# Altium PCB Agilent_ocxo.PcbDoc
Units mil, origin at the board's own origin, x right, y up, seen from the top; angles counter-clockwise.
Board outline 3631.03 x 2132.49 mil, 2 copper layers (Top Layer, Bottom Layer), stack 65.792 mil thick; 47 components, 28 nets, 162 pads, 673 vias.
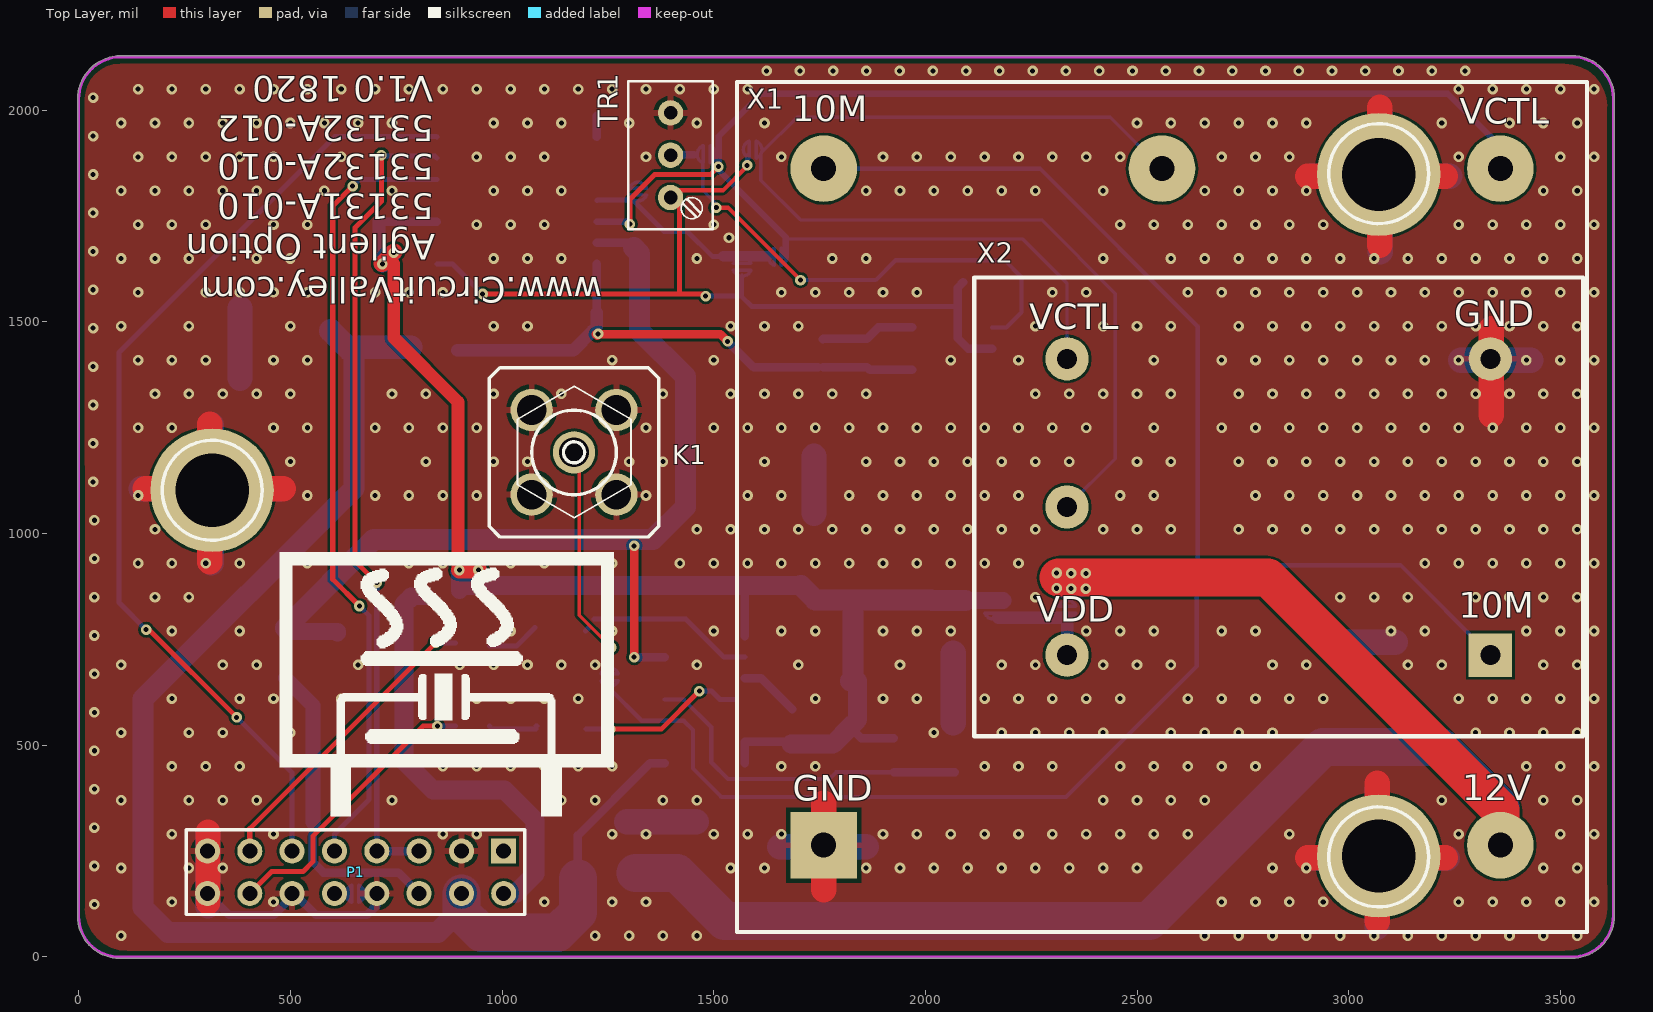
[diagram p0: Top Layer view]
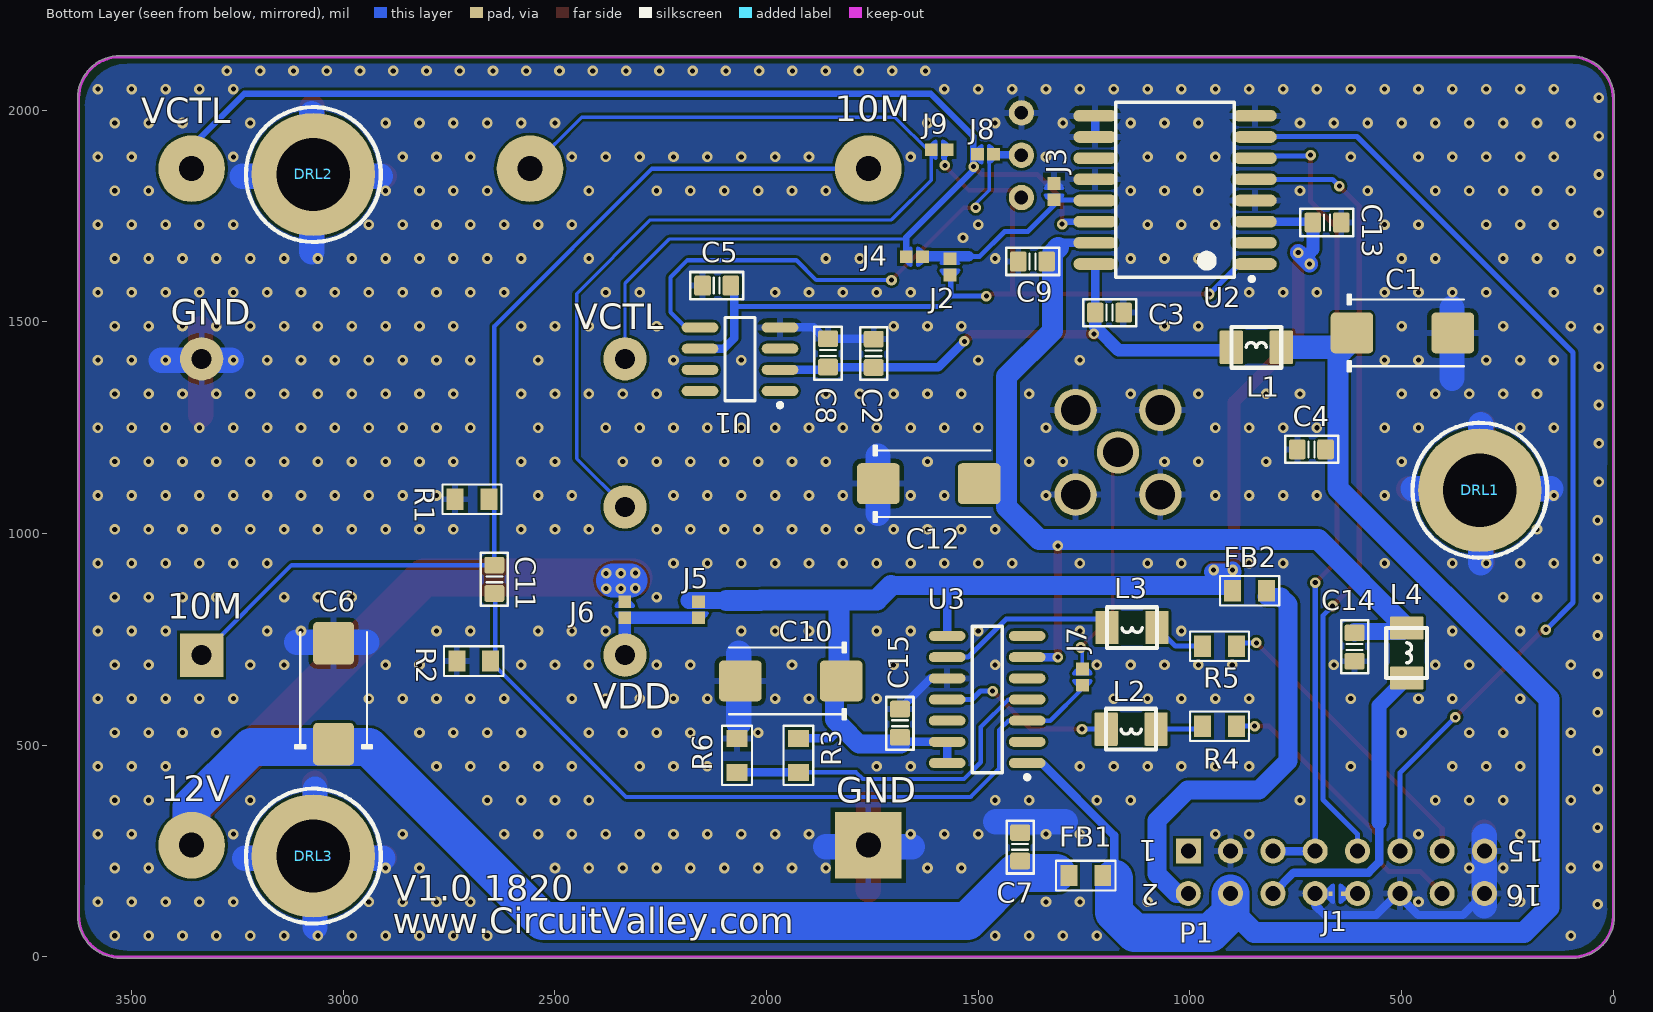
[diagram p1: Bottom Layer view, seen from below]

## Layer stack, top to bottom
Top Solder: solder mask 0.4, Solder Resist, Dk 3.5
Top Layer: signal copper 1.4
Dielectric 1: dielectric 62.9921, FR-4, Dk 4.8
Bottom Layer: signal copper 1.4
Bottom Solder: solder mask 0.4, Solder Resist, Dk 3.5

## Board outline
-3.01,95.95 -3.01,2026.03 cw(c0,2026.03) -3.01,2026.12 cw(c99.95,2026.03) 98.3,2128.98 cw(c99.95,2126.47) 101.57,2129.01 241,2129.01 cw(c241,2126) 241.07,2129.01 453.37,2129 1681.97,2129.01 1691,2129.01 1811,2129.01 cw(c1811,2126) 1811.07,2129.01 3247.33,2129.01 3443,2129.02 3527.75,2129.02 cw(c3527.75,2126) 3527.81,2129.01 cw(c3527.75,2028.75) 3628.01,2028.75 3628.01,1851 cw(c3625,1851) 3628.01,1850.99 3627.66,1667.5 cw(c3625,1666.09) 3628.01,1666.09 3628.01,468 cw(c3625,468) 3627.59,466.45 3628.02,281.01 3628.01,281.01 cw(c3625,281) 3628.01,281 3628.01,97.8 cw(c3527.2,97.8) 3527.2,-3.01 95.95,-3.01 cw(c95.95,95.95)

## Design rules (kind name [scope] priority, off if disabled: settings)
Clearance [All] p1: gap=6
ComponentClearance ComponentClearance_2 [InComponent('X2')] p1: gap=0 collisioncheckmode=3 verticalgap=0 showdistances=FALSE
ComponentClearance ComponentClearance_1 [InComponent('x1')] p2: gap=0 collisioncheckmode=3 verticalgap=0 showdistances=FALSE
ComponentClearance [All] p3: gap=10 collisioncheckmode=3 verticalgap=10 showdistances=FALSE
Height [All] p1: minheight=0 maxheight=1968.5 prefheight=500
PolygonConnect [All] p1: connectstyle=Relief reliefconductorwidth=15 reliefentries=4 polygonreliefangle="90 Angle" airgapwidth=10
RoutingVias [All] p1: holewidth=12 width=25 viastyle="Through Hole" minholewidth=12 minwidth=25 maxholewidth=500 maxwidth=500
SolderMaskExpansion [All] p1: expansion=4
Width [All] p1: maxlimit=500 minlimit=6 preferedwidth=10
28 further rules are at their usual default settings.

## Classes and differential pairs
component class Agilent_OCXO: DRL1 DRL2 DRL3 FB1 FB2 J2 J3 J4 J5 J6 J7 J8 K1 TR1 x1 X2

## Components (designator, comment, footprint, x,y, rotation, side; value= is the part's Value field where it differs from the comment)
C1 "47uf 20V D" CAPMP7343X310N 498,1474 r180 bottom
C2 "2.2u" CAPC1608N 1747,1426 r270 bottom
C3 "100n" CAPC1608N 1190,1522 r180 bottom
C4 "100n" CAPC1608N 713,1199 r180 bottom
C5 "2.2u" CAPC1608N 2118,1586 r180 bottom
C6 "47uf 20V D" CAPMP7343X310N 3023,622 r90 bottom
C7 "100n" CAPC1608N 1401,260 r270 bottom
C8 "10n" CAPC1608N 1855,1427 r270 bottom
C9 "100n" CAPC1608N 1372,1643 r180 bottom
C10 "47uf 20V D" CAPMP7343X310N 1943,652 r0 bottom
C11 "100n" CAPC1608N 2643.38,892 r90 bottom
C12 "47uf 20V D" CAPMP7343X310N 1617,1118 r180 bottom
C13 "100n" CAPC1608N 676,1735 r0 bottom
C14 "100n" CAPC1608N 611,732 r90 bottom
C15 "100n" CAPC1608N 1685,552 r270 bottom
DRL1 "Wurth Standoff" Wurth_PCB_STANDOFF_7740_6mm 314.96,1102.36 r180 bottom
DRL2 "Wurth Standoff" Wurth_PCB_STANDOFF_7740_6mm 3070.87,1848.43 r180 bottom
DRL3 "Wurth Standoff" Wurth_PCB_STANDOFF_7740_6mm 3070.87,238.19 r180 bottom
FB1 "HI0805Q310R-10" 0805FB-600Z 1216,192 r0 bottom
FB2 "HI0805Q310R-10" 0805FB-600Z 829,865 r0 bottom
J1 "BYPASS" BYPASS-MINI-CLOSED 619,149 r0 bottom
J2 "" BYPASS-CLOSED#1 1567,1664 r270 bottom
J3 "" BYPASS-CLOSED#2 1321,1842 r270 bottom
J4 "" BYPASS-CLOSED#3 1685,1654 r180 bottom
J5 "" BYPASS-CLOSED#4 2161,854 r270 bottom
J6 "" BYPASS-CLOSED#3 2335,854 r270 bottom
J7 "" BYPASS-CLOSED#5 1254,695 r270 bottom
J8 "" BYPASS-CLOSED#3 1517,1896 r180 bottom
J9 "" BYPASS-CLOSED#6 1558,1907 r0 bottom
K1 "SMA-V" SMA-V 1170,1192 r0 top
L1 "100u" NLV32T 843,1440 r0 bottom
L2 "100n" NLV32T 1139,538 r180 bottom
L3 "1u" NLV32T 1137,778 r180 bottom
L4 "100u" NLV32T 488,718 r90 bottom
P1 "Header 8X2" HDR2X8 1003.94,250 r180 top
R1 "215" 0805R-5K6 2666,1081 r0 bottom
R2 "215" 0805R-5K6 2662,699 r0 bottom
R3 "5K6" 0805R-5K6 1925,506 r270 bottom
R4 "100R" 0805R-100 960,545 r180 bottom
R5 "100R" 0805R-100 960,734 r180 bottom
R6 "5K6" 0805R-5K6 2070,446 r90 bottom
TR1 "THTRIM-GENERIC" TRIMMER-MT 1398,1994 r270 top locked
U1 "MAX6350CSA / ADR4550 / AD6250" NSO8_N 2063,1412 r0 bottom
U2 "AD7243AR" SOIC-16_WIDE 1035,1812 r0 bottom
U3 "LM361M" M14A_N 1479,608 r0 bottom
X1 "MV89A" MV89A 2559.06,1062.99 r0 top (schematic designator x1)
X2 "OCXO 36x27" OCXO_Small 2834.65,1062.99 r90 top locked

## Footprints (in the part's own frame and the unit in brackets; to place one, negate y for a bottom-side part, rotate by r counter-clockwise, add the part's x,y. Pads: shape width x height; smd on the part's side, far side on the other; paste and mask are expansions set on the pad)
0805FB-600Z [mil] "FERRITE BEAD 0805"
  rect 40x50 smd: 1(-10,0) 2(70,0)
  silkscreen extent -40,-35 100,35, body extent -11,-25 70,25, height 26
0805R-5K6 [mil] "RESISTOR 0805"
  rect 40x50 smd: 1(-10,0) 2(70,0)
  silkscreen extent -40,-35 100,35, body extent -11,-25 70,25, height 27
0805R-100 [mil] "RESISTOR 0805"
  rect 40x50 smd: 1(-10,0) 2(70,0)
  silkscreen extent -40,-35 100,35, body extent -11,-25 70,25, height 27
BYPASS-CLOSED#1 [mil] "SOLDERDOT BYPASS CLOSED"
  rect 30x30 smd: 1(15,0) 2(53,0)
  Top Layer lines w8: 42.17,20.43 cw(c34,0) 56,0 cw(c34,0) 53,-11.09 cw(c34,0) 42.17,-20.43 42.17,20.43 ; 25.83,20.43 ccw(c34,0) 14,9.17 ccw(c34,0) 12,0 ccw(c34,0) 25.83,-20.43 25.83,20.43
  body extent 5,-20 65,20, height 25
BYPASS-CLOSED#2 [mil] "SOLDERDOT BYPASS CLOSED"
  rect 30x30 smd: 1(15,0) 2(53,0)
  Top Layer lines w8: 42.17,20.43 cw(c34,0) 52,12.65 cw(c34,0) 53,11.09 cw(c34,0) 56,0 cw(c34,0) 53,-11.09 cw(c34,0) 42.17,-20.43 42.17,0 42.17,20.43 ; 25.83,20.43 ccw(c34,0) 25.83,-20.43 25.83,20.43
  body extent 5,-20 65,20, height 25
BYPASS-CLOSED#3 [mil] "SOLDERDOT BYPASS CLOSED"
  rect 30x30 smd: 1(15,0) 2(53,0)
  Top Layer lines w8: 56,0 ccw(c34,0) 42.17,20.43 42.17,0 42.17,-20.43 ccw(c34,0) 56,0 ; 25.83,-20.43 cw(c34,0) 12.02,-1 cw(c34,0) 12,0 cw(c34,0) 15,11.09 cw(c34,0) 25.83,20.43 25.83,0 25.83,-20.43
  body extent 5,-20 65,20, height 25
BYPASS-CLOSED#4 [mil] "SOLDERDOT BYPASS CLOSED"
  rect 30x30 smd: 1(15,0) 2(53,0)
  Top Layer lines w8: 42.17,20.43 cw(c34,0) 53,11.09 cw(c34,0) 56,0 cw(c34,0) 53,-11.09 cw(c34,0) 42.17,-20.43 42.17,0 42.17,16 42.17,20.43 ; 25.83,20.43 ccw(c34,0) 12.02,0.92 ccw(c34,0) 12,0 ccw(c34,0) 25.83,-20.43 25.83,0 25.83,5 25.83,20.43
  body extent 5,-20 65,20, height 25
BYPASS-CLOSED#5 [mil] "SOLDERDOT BYPASS CLOSED"
  rect 30x30 smd: 1(15,0) 2(53,0)
  Top Layer lines w8: 42.17,20.43 cw(c34,0) 56,0 cw(c34,0) 42.17,-20.43 42.17,20.43 ; 25.83,20.43 ccw(c34,0) 12,0 ccw(c34,0) 25.83,-20.43 25.83,20.43
  body extent 5,-20 65,20, height 25
BYPASS-CLOSED#6 [mil] "SOLDERDOT BYPASS CLOSED"
  rect 30x30 smd: 1(15,0) 2(53,0)
  Top Layer lines w8: 12,0 ccw(c34,0) 25.83,-20.43 25.83,0 25.83,20.43 ccw(c34,0) 25,20.07 ccw(c34,0) 12,0 ; 42.17,20.43 cw(c34,0) 42.17,-20.43 42.17,20.43
  body extent 5,-20 65,20, height 25
BYPASS-MINI-CLOSED [mil] "SOLDERDOT BYPASS"
  rect 10x10 smd paste-300: 1(19,0)
  rect 10x10 smd paste-30: 2(49,0)
  Top Layer region: 43,18 45,18 55,8 55,-9 46,-18 43,-18
  Top Layer region: 25,18 23,18 13,8 13,-9 22,-18 25,-18
  Top Layer lines w8: 25.83,20.43 ccw(c34,0) 25.83,-20.43 25.83,20.43 ; 42.17,20.43 cw(c34,0) 42.17,-20.43 42.17,20.43
  body extent 15,-20 55,20, height 25
CAPC1608N [mm] "Chip Capacitor, Body 1.6x0.8mm, 0603, IPC Medium Density"
  round 0.254 on Mech14: 0(0,0)
  rrect25% 1x1.2 smd: 1(-0.85,0) 2(0.85,0)
  Top Layer pour cut-out: -0.4,0.6 0.4,0.6 0.4,-0.6 -0.4,-0.6
  silkscreen extent -1.57,-0.81 1.6,0.81, body extent -0.85,-0.45 0.85,0.45, height 0.89
CAPMP7343X310N [mm] "Molded body capacitor, Body 7.3x4.3mm, 2917, IPC Nominal settings"
  round 1 on Mech14: 0(0,0)
  rrect20% 2.55x2.45 smd: 1(-3.025,0) 2(3.025,0)
  silkscreen extent -3.3,-2.3 3.7,2.3, body extent -3.8,-1.97 3.8,1.98, height 3.1
HDR2X8 [mm] "Connector; Header; 8x2 Position"
  rect 1.5x1.5 hole 0.9: 1(0,0)
  round 1.5 hole 0.9: 2(0,2.54) 3(2.54,0) 4(2.54,2.54) 5(5.08,0) 6(5.08,2.54) 7(7.62,0) 8(7.62,2.54) 9(10.16,0) 10(10.16,2.54) 11(12.7,0) 12(12.7,2.54) 13(15.24,0) 14(15.24,2.54) 15(17.78,0) 16(17.78,2.54)
  silkscreen extent -1.27,-1.27 19.05,3.81
M14A_N [mm] "SOIC, 14-Leads, Body 8.6x3.9mm, Pitch 1.27mm, IPC Medium Density"
  oval 2.2x0.6 smd: 1(-2.4,3.81) 2(-2.4,2.54) 3(-2.4,1.27) 4(-2.4,0) 5(-2.4,-1.27) 6(-2.4,-2.54) 7(-2.4,-3.81) 8(2.4,-3.81) 9(2.4,-2.54) 10(2.4,-1.27) 11(2.4,0) 12(2.4,1.27) 13(2.4,2.54) 14(2.4,3.81)
  silkscreen extent -2.52,-4.4 0.9,4.78, body extent -2,-4.38 2,4.38, height 1.75
MV89A [mm] "Morion MV89A"
  rect 4x4 hole 1.5: 1(-20.3,-20.3)
  round 4 hole 1.5: 2(20.3,-20.3) 3(20.3,20.3) 4(0,20.3) 5(-20.3,20.3)
  silkscreen extent -25.5,-25.5 25.5,25.5, body extent -25.5,-25.5 25.5,25.5, height 38
NLV32T [mm] "TDK NLV32T-1R0J-EF  (OCXO)"
  rrect10% 1.4x2 smd: 1(-1.5,0) 2(1.5,0)
  Top Layer pour cut-out: -0.635,0.991 -0.635,-1.067 0.635,-1.067 0.635,0.991
  silkscreen extent -1.5,-1.22 1.5,1.22, body extent -1.6,-1.25 1.6,1.25, height 2.29
NSO8_N [mm] "SOIC, 8-Leads, Body 4.9x3.9mm, Pitch 1.27mm, IPC Medium Density"
  oval 2.2x0.6 smd: 1(-2.4,1.905) 2(-2.4,0.635) 3(-2.4,-0.635) 4(-2.4,-1.905) 5(2.4,-1.905) 6(2.4,-0.635) 7(2.4,0.635) 8(2.4,1.905)
  silkscreen extent -2.52,-2.5 0.9,2.88, body extent -2,-2.5 2,2.5, height 1.75
OCXO_Small [mm] "Bliley 6891 ISOTEMP OCXO131"
  rect 2.6x2.6 hole 1.2: 1(-8.89,-12.7)
  round 2.6 hole 1.2: 2(8.89,-12.7) 3(8.89,12.7) 4(0,12.7) 5(-8.89,12.7)
  silkscreen extent -13.77,-18.26 13.77,18.26, body extent -13.77,-18.26 13.77,18.24, height 19.8
SMA-V [mil]
  round 100 hole 70: 1(0,0) 2(100,-100) 3(100,100) 4(-100,100) 5(-100,-100)
  silkscreen extent -200,-200 200,200, body extent -138,-136 137,140, height 386
SOIC-16_WIDE [mm] "AD7243"
  oval 2.6x0.7 smd: 1(-4.8,4.445) 2(-4.8,3.175) 3(-4.8,1.905) 4(-4.8,0.635) 5(-4.8,-0.635) 6(-4.8,-1.905) 7(-4.8,-3.175) 8(-4.8,-4.445) 9(4.8,-4.445) 10(4.8,-3.175) 11(4.8,-1.905) 12(4.8,-0.635) 13(4.8,0.635) 14(4.8,1.905) 15(4.8,3.175) 16(4.8,4.445)
  silkscreen extent -4.72,-5.25 3.56,5.47, body extent -5.31,-5.25 5.32,5.25, height 2.66
TRIMMER-MT [mil]
  round 60 hole 32: 1(0,0) 2(200,0) W(100,0)
  silkscreen extent -75,-100 275,100
Wurth_PCB_STANDOFF_7740_6mm [mm] "9774010360"
  round 7.4 hole 4.4: 0(0,0)
  silkscreen extent -4.05,-4.05 4.04,4.05, body extent -3,-3 3,3, height 6.01

## Part data
C1 C6 C10 C12: library part CAPT_330u_2917_6V3, "Capacitor SMD Tant 330uF 20% 6V3 2917"
C2 C3 C4 C5 C7 C8 C9 C11 C13 C14 C15: library part CAPC_10p_0603_NP0_1%_50V, "Capacitor SMD Cer 10pF 5% 50V NP0 0603"
DRL1 DRL2 DRL3: library part PCB_Sandoff
FB1 FB2: library part 0805FB-600Z, "FERRITE BEAD 600 OHM 2A"
J1: library part BYPASS-MINI-CLOSED, "SOLDERDOT BYPASS"
J2 J3 J4 J5 J6 J7 J8 J9: library part BYPASS-CLOSED, "SOLDERDOT BYPASS"
K1: "SMA THREADED RF CONNECTOR VERTICAL"
L1 L2 L3 L4: library part inductor_smd
P1: "Header, 8-Pin, Dual row"
R1 R2 R3 R6: library part 0805R-5K6, "RESISTOR 0805 1/4 WATT THIN FILM"
R4 R5: library part 0805R-100, "RESISTOR 0805 1/4 WATT THIN FILM"
TR1: "TRIMMABLE RESISTOR"
U1: library part MAX6350CSA, "1ppm/°C, Low-Noise, +5V Voltage Reference"
U2: library part AD7243
U3: "High Speed Differential Comparator, 14-pin Narrow SOIC"
X1: library part MV89A_OCXO
X2: library part OCXO_Small_Bliey_6891_isotemp_ocxo131

## Via types
v1: diameter 25, hole 12, Top Layer to Bottom Layer, tented both sides, 673 vias

## Nets (pads, with @x,y where several pads share a name; then routed paths per layer and width w, separated by ;. In a path a pad name is that pad's centre, name@x,y a point inside that pad or via, vN(x,y) a via of type N, cw(c..) or ccw(c..) an arc to the next point about the centre after c; other vN are vias at no path point)
5V: C10.1 C13.2 C15.2 FB2.2 J5.1 R3.1 U2.3 U3.8 U3.13 U3.14 | length 3362.3
  Top Layer w30: 734,1647 744,1637 744,1463 896,1311 v1@896,917
  Top Layer w39.37: v1@716.5,1637.5 v1@745,1666
  Top Layer w40: v1(899,914) v1(944,914)
  Bottom Layer w20: C13.2@712.46,1737 U2.3 ; U3.14 U3.13 C15.2@1674.46,508 ; U3.8 1573.49,863.49 1587,877 ; 1822,543 1849,516 R3.1
  Bottom Layer w30: C13.2@709,1736.54 709,1671 717,1663
  Bottom Layer w40: v1(717,1637) v1(744,1664) ; v1@898,909 v1@947,909 ; FB2.2 v1(899,914) ; 2095,842 2161,842 2184,842
  Bottom Layer w45: 920,877 1587,877 1706,877 ; C15.2@1683,503 1782,503 1822,543 1839.91,560.91 C10.1@1839.91,652
  Bottom Layer w50: 1706,877 1740,843 1829,843 ; C10.1 1829,657.09 1829,843 ; 2095,842 2015,842 2014,843 1829,843
10M_OUT: P1.14 R4.2 | length 684.8
  Top Layer w12: P1.14 455.94,202 530,202 553,225 553,285 813,545 v1(847,545)
  Bottom Layer w12: v1(847,545) R4.2
10M_OUT_L: P1.13 R5.2 | length 720.9
  Top Layer w12: P1.13 403.94,302.94 v1(843,742)
  Bottom Layer w12: v1(843,742) R5.2@890,742
+12V: C1.1 C4.2 FB1.1 L1.1 P1.4 U3.1 | length 3351.3
  Bottom Layer w20: 1179,185 1179,287 1350,458 U3.1
  Bottom Layer w50: C1.1@650,1433 650,1107 152,609 152,117 211,58 848,58 903.94,113.94
  Bottom Layer w55: C1.1@595.09,1479 641.09,1433 650,1433 657,1440 L1.1
  Bottom Layer w90: P1.4 903.94,113.94 903.94,104.06 951,57 1131,57 1179,105 1179,185
-12V: C9.2 C12.2 C14.2 L4.2 U2.15 U3.6 | length 2269.4
  Top Layer w20: v1(1312,708) v1(1312,971)
  Bottom Layer w20: U2.15 1301,1687 ; v1(1312,708) U3.6
  Bottom Layer w40: L4.2 496.06,769 611,769 C14.2
  Bottom Layer w50: L4.2 696.94,986 1356,986 1433,1063 1433,1371 1325,1479 1325,1662 1311,1676
GND: C1.2 C2.1 C3.2 C4.1 C5.1 C6.2 C7.1 C8.1 C9.1 C10.2 C12.1 C13.1 C14.1 C15.1 DRL1.0 DRL2.0 DRL3.0 J1.2 J3.1 K1.2 K1.3 K1.4 K1.5 P1.3 P1.8 P1.12 P1.15 P1.16 R1.2 R2.2 R6.2 TR1.1 U1.4 U2.4 U2.8 U2.9 U2.10 U2.12 U3.10 X1.1 X2.2 | length 6832.5
  Top Layer w60: 156.96,1106.14 482.96,1106.14 ; P1.16@305.22,129.22 305.22,294.16 ; v1@309.78,933 309.78,1259 ; 1760,159 1760,363 ; 2902.87,234.41 3228.87,234.41 ; 2902.87,1844.65 3228.87,1844.65 ; 3067.78,84 3067.78,410 ; 3073.22,1681 3073.22,2007 ; 3337.22,1280 3337.22,1484
  Bottom Layer w20: P1.15 P1.16 354.94,99 461,99 503.94,141.94 P1.12 509,150 560,99 681,99 703.94,121.94 P1.8 ; U2.10 U2.9 ; U3.10 1612.46,658 C15.1 ; C2.1@1758,1459.46 1759,1460.46 1862,1460.46 1888.54,1487 U1.4
  Bottom Layer w60: 146.96,1106.14 472.96,1106.14 ; P1.16@304.78,120.69 304.78,285.63 ; 312.78,931 312.78,1257 ; 380.78,1367.22 380.78,1532.16 ; 1294.06,319 1459,319 ; 1656,259.78 1860,259.78 ; 1737,1048 1737,1182.78 ; 2066.22,552.84 2066.22,717.78 ; 2907,232.78 3233,232.78 ; 2912.87,1844.65 3238.87,1844.65 ; 2944.84,743.78 3109.78,743.78 ; 3067.09,70.19 3067.09,396.19 ; 3074.78,1666 DRL2.0@3074.78,1992 ; v1@3264.84,1409.74 v1@3429.77,1409.74
  other v1: 100,50 1220,50 1300,50 1380,50 1460,50 2660,50 2740,50 2820,50 2900,50 2980,50 3060,50 3140,50 3220,50 3300,50 3380,50 3460,50 3540,50 37,124 220,130 460,130 1100,130 1260,130 1340,130 2700,130 2780,130 2860,130 2940,130 3260,130 3340,130 3420,130 3500,130 3580,130 100,210 260,210 340,210 1540,210 1620,210 1860,210 1940,210 2020,210 2100,210 2180,210 2260,210 2340,210 2420,210 2500,210 2820,210 2900,210 3460,210 3540,210 37,214.76 220,290 460,290 860,290 940,290 1260,290 1340,290 1500,290 1580,290 1660,290 1900,290 1980,290 2060,290 2140,290 2220,290 2300,290 2380,290 2460,290 2540,290 2620,290 2860,290 3260,290 3500,290 3580,290 37,305.52 100,370 260,370 340,370 420,370 740,370 1140,370 1220,370 1380,370 1460,370 2420,370 2500,370 2580,370 2660,370 3220,370 3460,370 3540,370 37,396.29 220,450 300,450 380,450 620,450 860,450 940,450 1020,450 1100,450 1180,450 1260,450 1660,450 1740,450 2140,450 2220,450 2300,450 2460,450 2540,450 2620,450 2700,450 2780,450 3420,450 3500,450 3580,450 37,487.05 100,530 260,530 340,530 500,530 2020,530 2180,530 2260,530 2340,530 2420,530 2580,530 2660,530 2740,530 2820,530 3300,530 3380,530 3460,530 3540,530 37,577.81 220,610 380,610 460,610 620,610 860,610 940,610 1020,610 1100,610 1180,610 1740,610 1900,610 1980,610 2140,610 2220,610 2300,610 2380,610 2460,610 2620,610 2700,610 2780,610 2860,610 2940,610 3260,610 3340,610 3420,610 3500,610 3580,610 37,668.57 100,690 340,690 420,690 660,690 900,690 980,690 1060,690 1140,690 1220,690 1460,690 1700,690 1940,690 2180,690 2260,690 2420,690 2500,690 2580,690 2820,690 2900,690 3140,690 3220,690 3460,690 3540,690 37,759.33 220,770 380,770 1020,770 1260,770 1500,770 1660,770 1740,770 1900,770 1980,770 2060,770 2380,770 2460,770 2540,770 2700,770 2780,770 3100,770 3180,770 3420,770 3500,770 3580,770 37,850.1 180,850 260,850 2260,850 2980,850 3060,850 3140,850 3300,850 3380,850 3460,850 3540,850 140,930 220,930 300,930 380,930 540,930 780,930 860,930 1020,930 1100,930 1260,930 1420,930 1500,930 1580,930 1660,930 1740,930 1820,930 1900,930 1980,930 2060,930 2140,930 2220,930 3180,930 3260,930 3340,930 3420,930 3500,930 3580,930 37,940.86 180,1010 1460,1010 1540,1010 1620,1010 1700,1010 1780,1010 1860,1010 1940,1010 2020,1010 2100,1010 2180,1010 2260,1010 2420,1010 2500,1010 2580,1010 2740,1010 2820,1010 2900,1010 2980,1010 3060,1010 3140,1010 3220,1010 3300,1010 3380,1010 3460,1010 3540,1010 37,1031.62 140,1090 540,1090 700,1090 780,1090 860,1090 940,1090 1340,1090 1580,1090 1660,1090 1820,1090 1900,1090 1980,1090 2060,1090 2140,1090 2220,1090 2460,1090 2540,1090 2780,1090 2860,1090 2940,1090 3020,1090 3100,1090 3180,1090 3260,1090 3340,1090 3420,1090 3500,1090 3580,1090 34,1122.38 500,1170 820,1170 980,1170 1060,1170 1300,1170 1380,1170 1620,1170 1860,1170 1940,1170 2020,1170 2100,1170 2180,1170 2260,1170 2340,1170 2500,1170 2580,1170 2740,1170 2820,1170 2900,1170 2980,1170 3060,1170 3140,1170 3220,1170 3300,1170 3380,1170 3460,1170 3540,1170 34,1213.14 140,1250 220,1250 460,1250 540,1250 700,1250 780,1250 860,1250 940,1250 1340,1250 1500,1250 1580,1250 1660,1250 1740,1250 1820,1250 1900,1250 1980,1250 2060,1250 2140,1250 2220,1250 2300,1250 2380,1250 2540,1250 2700,1250 2780,1250 2860,1250 2940,1250 3020,1250 3100,1250 3180,1250 3260,1250 3340,1250 3420,1250 3500,1250 3580,1250 34,1303.9 180,1330 260,1330 340,1330 420,1330 500,1330 740,1330 820,1330 980,1330 1140,1330 1380,1330 1540,1330 1620,1330 1700,1330 1780,1330 1860,1330 2260,1330 2340,1330 2420,1330 2500,1330 2580,1330 2740,1330 2820,1330 2900,1330 2980,1330 3060,1330 3140,1330 3220,1330 3300,1330 3380,1330 3460,1330 3540,1330 34,1394.67 140,1410 220,1410 300,1410 460,1410 540,1410 1260,1410 1500,1410 2060,1410 2220,1410 2540,1410 2700,1410 2780,1410 2860,1410 2940,1410 3020,1410 3100,1410 3180,1410 3260,1410 3420,1410 3500,1410 3580,1410 34,1485.43 100,1490 260,1490 500,1490 980,1490 1060,1490 1540,1490 1620,1490 1700,1490 2260,1490 2420,1490 2500,1490 2580,1490 2740,1490 2820,1490 2900,1490 2980,1490 3060,1490 3140,1490 3220,1490 3300,1490 3380,1490 3460,1490 3540,1490 140,1570 300,1570 380,1570 460,1570 540,1570 700,1570 780,1570 860,1570 1660,1570 1740,1570 1820,1570 1900,1570 1980,1570 2300,1570 2380,1570 2620,1570 2700,1570 2780,1570 2860,1570 2940,1570 3020,1570 3100,1570 3180,1570 3260,1570 3340,1570 3420,1570 3500,1570 3580,1570 34,1576.19 100,1650 180,1650 260,1650 420,1650 500,1650 980,1650 1060,1650 1140,1650 1460,1650 1780,1650 1860,1650 2420,1650 2580,1650 2660,1650 2740,1650 2820,1650 2900,1650 2980,1650 3060,1650 3140,1650 3220,1650 3300,1650 3380,1650 3460,1650 3540,1650 34,1666.95 1536,1699 140,1730 220,1730 300,1730 460,1730 540,1730 940,1730 1020,1730 1100,1730 1500,1730 2460,1730 2540,1730 2620,1730 2700,1730 2780,1730 2860,1730 2940,1730 3260,1730 3340,1730 3420,1730 3500,1730 3580,1730 34,1757.71 100,1810 180,1810 260,1810 340,1810 420,1810 580,1810 740,1810 980,1810 1060,1810 1140,1810 1860,1810 1940,1810 2020,1810 2100,1810 2180,1810 2260,1810 2420,1810 2660,1810 2740,1810 2820,1810 2900,1810 3460,1810 3540,1810 34,1848.48 140,1890 220,1890 300,1890 380,1890 460,1890 620,1890 940,1890 1020,1890 1100,1890 1340,1890 1660,1890 1900,1890 1980,1890 2060,1890 2140,1890 2220,1890 2300,1890 2380,1890 2460,1890 2700,1890 2780,1890 2860,1890 3260,1890 3500,1890 3580,1890 34,1939.24 100,1970 180,1970 260,1970 340,1970 420,1970 500,1970 580,1970 660,1970 740,1970 980,1970 1060,1970 1140,1970 1300,1970 1460,1970 1620,1970 2500,1970 2580,1970 2660,1970 2740,1970 2820,1970 2900,1970 3220,1970 3380,1970 3460,1970 3540,1970 34,2030 140,2050 220,2050 300,2050 380,2050 460,2050 540,2050 620,2050 700,2050 780,2050 860,2050 940,2050 1020,2050 1100,2050 1180,2050 1260,2050 1340,2050 1420,2050 1500,2050 1580,2050 3260,2050 3340,2050 3420,2050 3500,2050 3580,2050 1625,2093 1703.57,2093 1782.14,2093 1860.71,2093 1939.29,2093 2017.86,2093 2096.43,2093 2175,2093 2253.57,2093 2332.14,2093 2410.71,2093 2489.29,2093 2567.86,2093 2646.43,2093 2725,2093 2803.57,2093 2882.14,2093 2960.71,2093 3039.29,2093 3117.86,2093 3196.43,2093 3275,2093
NetC2_2: C2.2 C3.1 C8.2 L1.2 U1.2 U2.16 | length 1252.8
  Top Layer w20: v1(1227,1472) 1222,1472 1221,1471 1225,1467 1229,1471 1516,1471 v1(1533,1454)
  Bottom Layer w20: C3.1@1223.98,1536.49 U2.16 ; v1(1533,1454) 1594.46,1392.54 C2.2 ; C2.2@1759,1393.54 C8.2 1862,1393.54 1868.54,1387 U1.2
  Bottom Layer w30: L1.2@894,1433 1168,1433 1213.5,1478.5 ; 1223.46,1488.46 C3.1
NetFB2_1: FB2.1 P1.2 | length 1017
  Bottom Layer w40: 785,850 786,851 FB2.1@820,851
  Bottom Layer w45: 785,850 768,833 768,463 837,394 1006,394 1078,322 1078,196 1032,150 P1.2
NetJ1_1: J1.1 P1.10
NetJ2_1: J2.1 J3.2 J4.2 U2.13 | length 458.5
  Bottom Layer w12: U2.13 1224.98,1788 1309,1788 1383,1714 1437.7,1714 1496.7,1655 1523,1655
  Bottom Layer w25: 1523,1655 J4.2@1627,1655
NetJ7_1: J7.1 K1.1 | length 541.1
  Top Layer w8: K1.1@1182,1191 1182,807 v1(1258,731)
  Bottom Layer w8: J7.1@1254,683 1254,727 v1(1258,731)
NetL2_1: L2.1 U3.11 | length 398.5
  Top Layer w12: v1(1255,538) 1376,538 v1(1466,628)
  Bottom Layer w12: L2.1 v1(1255,538) ; v1(1466,628) 1495,628 1515,608 U3.11@1551,608
NetL2_2: L2.2 R4.1 | length 114.8
  Bottom Layer w12: R4.1 977,538 L2.2 ; L2.2@1079.94,545 L2.2@1081.94,545
NetL3_1: L3.1 U3.9 | length 403.6
  Bottom Layer w12: L3.1@1197.06,770 L3.1@1204.06,777 ; L3.1@1217.06,798 1434,798 1524,708 U3.9
NetL3_2: L3.2 R5.1 | length 126.2
  Bottom Layer w12: R5.1 1033.94,734 L3.2
NetL4_1: L4.1 P1.6 | length 743.5
  Bottom Layer w20: 553,318 553,224 578,199 754.94,199 P1.6
  Bottom Layer w35: L4.1 553,593.94 553,318
NetR3_2: R3.2 R6.1 U3.4 | length 818.6
  Bottom Layer w10: U3.4 1429,608 1494,543 1494,460 1534,420 1773,420 1789,436 R3.2
  Bottom Layer w20: R3.2 R6.1
OCXO_REF: J9.2 X1.4 X2.4 | length 2593.5
  Bottom Layer w8: J9.2@1611,1898 1611,1886.91 1611,1835 1705,1741 2275,1741 2449,1567 2449,1177.35 X2.4 ; J9.2@1613.82,1900.82 1697,1984 2437.26,1984 X1.4
OCXO_VCTL: J4.1 J8.1 U2.14 X1.3 X2.3 | length 3658.5
  Top Layer w12: v1(1302,1731) 1302,1790 1360,1848 1492,1848 v1(1511,1867)
  Bottom Layer w8: J4.1 1670,1692 1674,1696 2229.58,1696 2334.65,1590.94 X2.3
  Bottom Layer w15: U2.14 1296,1737 v1(1302,1731) ; J8.1@1504.82,1893.18 J8.1@1512,1886 ; J4.1 1670,1665.09 1670,1700 1512,1858 J8.1@1512,1886 ; X1.3 3358.27,1914.73 3234,2039 1612,2039 1512,1939 J8.1@1512,1886
OX12: C6.1 C7.2 FB1.2 J6.1 X1.2 | length 3884.7
  Top Layer w25: v1(2310,907) 2311,906 v1@2343,906 ; 2333,894 2367,894 v1@2371,898
  Top Layer w80: v1@2315,896 2320,891
  Top Layer w90: v1@2315,896 2809,896 3358.27,346.73 X1.2
  Bottom Layer w80: 2322,889 2363,889
  Bottom Layer w90: 1315,198 1413,198 1526,85 2529,85 2940,496 3217,496 3358.27,354.73 X1.2
  other v1: 2344.5,870 2379,870 2310,871 2344.5,906 2379,906
REF: C5.2 J2.2 J9.1 TR1.2 U1.6 U2.1 | length 2030.8
  Top Layer w10: TR1.2 1415,1811 1522,1811 1579,1868 v1(1579,1870)
  Top Layer w12: v1(954,1566) 1419.43,1566 ; TR1.2 1419.43,1772.57 1419.43,1566 ; v1(1481,1561) 1476,1566 1419.43,1566
  Bottom Layer w10: v1(1579,1870) J9.1@1579,1894
  Bottom Layer w12: U2.1 883,1637 v1(954,1566) ; v1(1481,1561) 1565,1561 ; J2.2@1567,1608 1565,1606 1565,1561 ; 2072,1543 2076,1547 ; 2078,1537 1589,1537 1565,1561
  Bottom Layer w20: C5.2@2089.46,1594 2076,1580.54 2076,1547 2076,1462 2101,1437 U1.6
RF: C11.1 J7.2 R2.1 U3.3 | length 1852
  Bottom Layer w10: J7.2 1254,634 1330,558 U3.3 1429,558 1451,536 1451,445 1518,378 2332,378 2641.38,687.38 C11.1@2641.38,856.54
S\Y\N\C\: P1.11 U2.7 | length 2314.2
  Top Layer w12: v1(159,773) 166,773 v1(373,566)
  Bottom Layer w12: v1(159,773) 95,837 95,1428 605,1938 845.02,1938 U2.7 ; v1(373,566) 503.94,435.06 P1.11
SCLK: P1.9 U2.5 | length 1865.7
  Top Layer w12: v1(647,1821) 600,1774 600,892 v1(663,829)
  Bottom Layer w12: P1.9 603.94,289.94 686,372 686,806 v1(663,829) ; v1(647,1821) 663,1837 U2.5
SDIN: P1.5 P1.7 U2.6 | length 2014.7
  Top Layer w12: v1(704,884) 653,935 653,1723 715,1785 v1(715,1894)
  Bottom Layer w12: v1(704,884) 704,267 721,250 P1.5 ; v1(715,1894) 717,1892 841.02,1892 U2.6
  Bottom Layer w20: P1.7 P1.5
TRIM: J8.2 TR1.W U1.5 | length 1170.4
  Top Layer w10: v1@1506,1771 v1(1506,1770) 1534,1770 v1(1705,1599)
  Bottom Layer w8: 1474,1875.93 1474,1811 1506,1779 v1(1506,1770)
  Bottom Layer w10: v1(1705,1599) 1883,1599 1930,1646 2186.79,1646 2227,1605.79 2227,1523 2191,1487 U1.5
  Bottom Layer w18: TR1.W 1399.08,1895.08 J8.2@1452.62,1895.08
VX2: J5.2 J6.2 X2.5 | length 240
  Bottom Layer w30: J5.2@2172.09,801 J6.2@2323.91,801 ; X2.5 2335,713.35 2335,798 J6.2
XOUT: C11.2 R1.1 X1.5 X2.1 | length 2381.3
  Bottom Layer w10: X1.5 2270.8,1862.2 2643.38,1489.62 C11.2 3122.17,925.46 X2.1
pads on no net: C1.0 C2.0 C3.0 C4.0 C5.0 C6.0 C7.0 C8.0 C9.0 C10.0 C11.0 C12.0 C13.0 C14.0 C15.0 P1.1 U1.1 U1.3 U1.7 U1.8 U2.2 U2.11 U3.2 U3.5 U3.7 U3.12

## Polygon pours and split planes (outlines as drawn)
GND on Top Layer "Top Layer-No Net" (solid, remove dead copper, pour order 3): 1174,14.52 115,14.52 cw(c115,114.52) 15,114.52 15,294.52 15,2027 cw(c97.52,2027) 97.52,2109.52 789,2109.52 3510,2109.52 cw(c3510,2009.52) 3610,2009.52 3610,224.52 3610,114.52 cw(c3510,114.52) 3510,14.52 1175,14.52
GND on Bottom Layer "Top Layer-No Net" (solid, remove dead copper, pour order 4): 1174,15 115,15 cw(c115,115) 15,115 15,295 15,2029 cw(c96,2029) 96,2110 789,2110 3510,2110 cw(c3510,2010) 3610,2010 3610,225 3610,115 cw(c3510,115) 3510,15 1175,15

## Keep-outs
Keep-Out Layer:
  lines w6: 99.95,2125.98 ccw(c99.95,2026.03) 0,2026.03 0,95.95 ccw(c95.95,95.95) 95.95,0 1835,0 3527.2,0 ccw(c3527.2,97.8) 3625,97.8 3625,281 3624.57,468 ; 99.95,2126.47 ccw(c100.42,2126.47) 100.42,2126 241,2126 ; 228,2126 454,2125.98 ; 434.02,2125.98 1691,2126 ; 1682,2126 1811,2126 ; 1804,2126 3247.33,2126 3443,2126 3527.75,2126 cw(c3527.75,2028.75) 3625,2028.75 3625,1858 3625,1851 3624.65,1666.09 ; 3625,468 3625,1666.09

## Silkscreen, mask and mechanical layers (free items; w line width, h text height)
Top Overlay:
  drawing of 10 lines, arcs and shapes, not listed
  text "V1.0 1820" at 837,2080 h60 r180
  text "53132A-012" at 839,1987 h60 r180
  text "10M" at 1685,1974 h60
  text "VCTL" at 3262,1968 h60
  text "53132A-010" at 838,1896 h60 r180
  text "53131A-010" at 839,1803 h60 r180
  text "Agilent Option" at 842,1707 h60 r180
  text "www.CircuitValley.com" at 1237,1606 h60 r180
  text "GND" at 3249,1490 h60
  text "VCTL" at 2246,1483 h60
  text "10M" at 3260,801 h60
  text "VDD" at 2262,792 h60
  text "12V" at 3268,370 h60
  text "GND" at 1687,369 h60
Bottom Overlay:
  text "10M" at 1839,1974 h60
  text "VCTL" at 3477,1970 h60
  text "GND" at 3408,1493 h60
  text "VCTL" at 2455,1483 h60
  text "10M" at 3416,799 h60
  text "VDD" at 2410,586 h60
  text "12V" at 3430,368 h60
  text "GND" at 1836,364 h60
  text "V1.0 1820" at 2883,132.97 h60
  text "www.CircuitValley.com" at 2883,55.97 h60

## Text inside footprints (layer, text, board x,y; h text height)
P1: Bottom Overlay "1" at 1077,276 h50 r180; Bottom Overlay "2" at 1073,172 h50 r180; Bottom Overlay "15" at 164,274 h50 r180; Bottom Overlay "16" at 167,169 h50 r180